# Altium PCB BUCKCONVERTER-V1L1.PcbDoc (part 1 of 3)
Units mm, origin at the board's own origin, x right, y up, seen from the top; angles counter-clockwise.
Board outline 95.98 x 51.66 mm, 2 copper layers (Top Layer, Bottom Layer); 114 components, 64 nets, 347 pads, 125 vias.
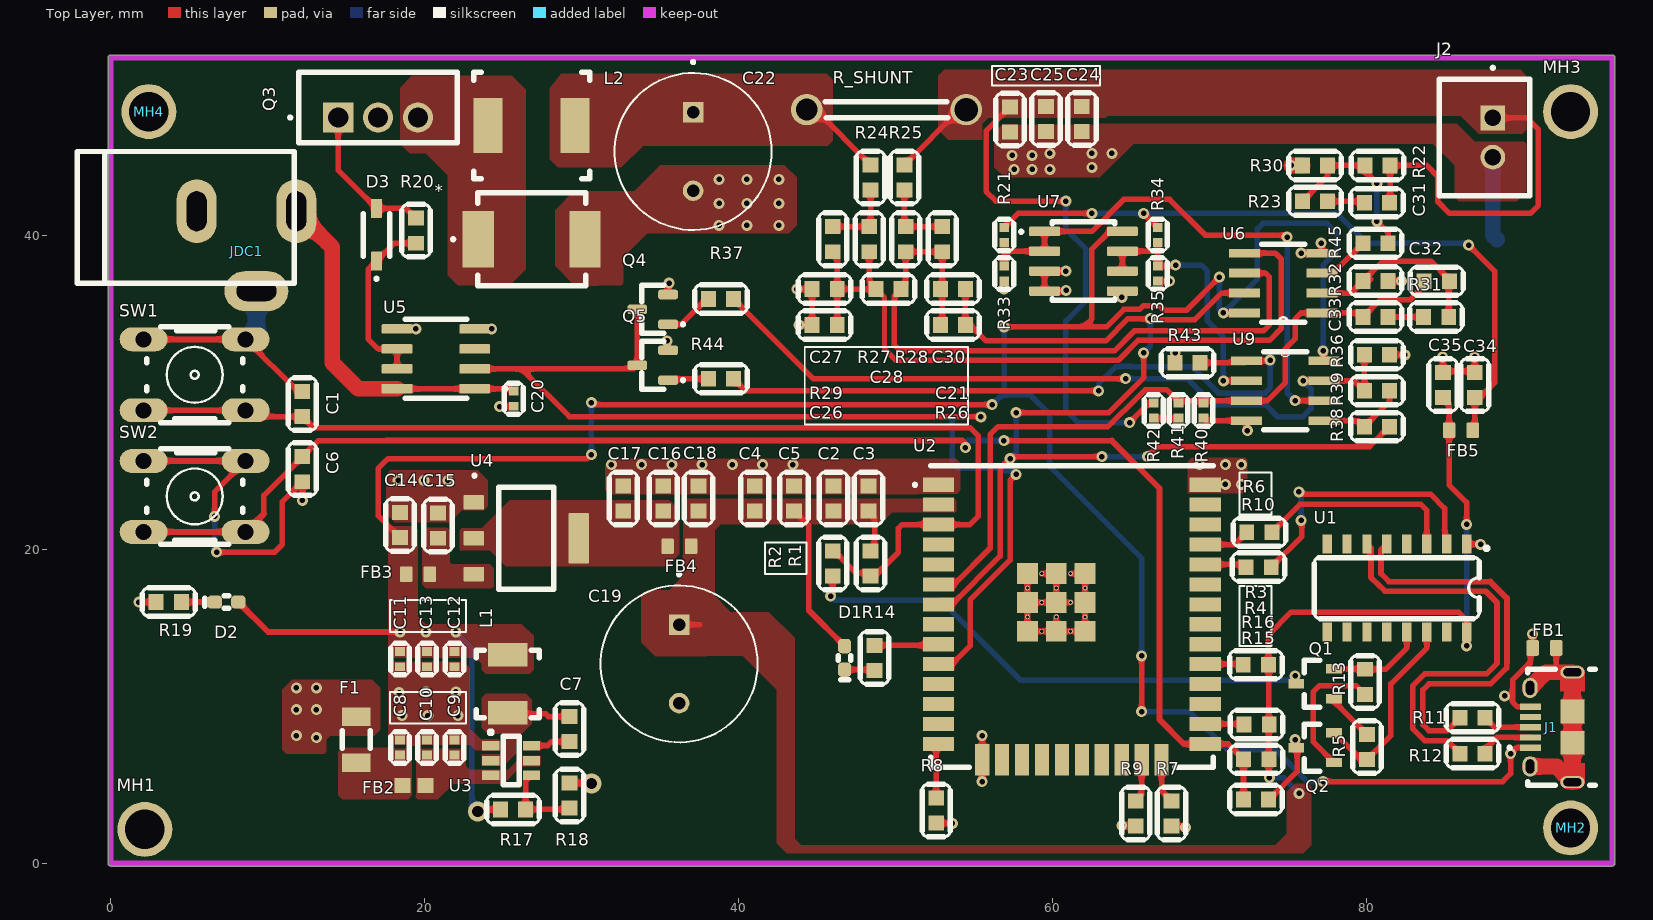
[diagram p0: Top Layer view]
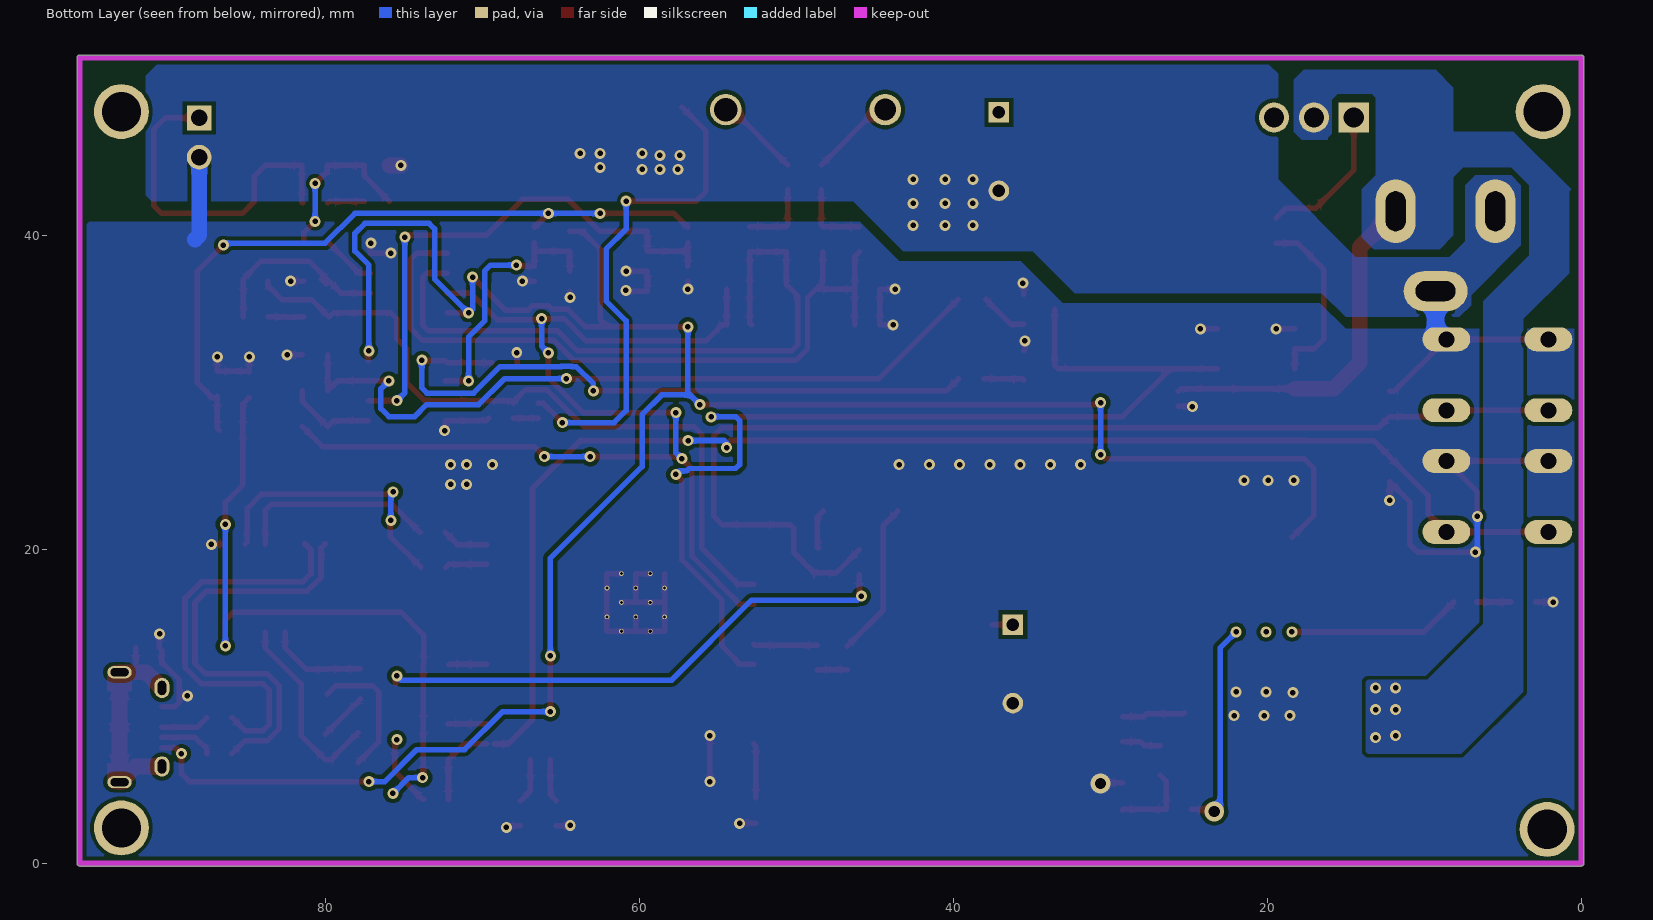
[diagram p1: Bottom Layer view, seen from below]
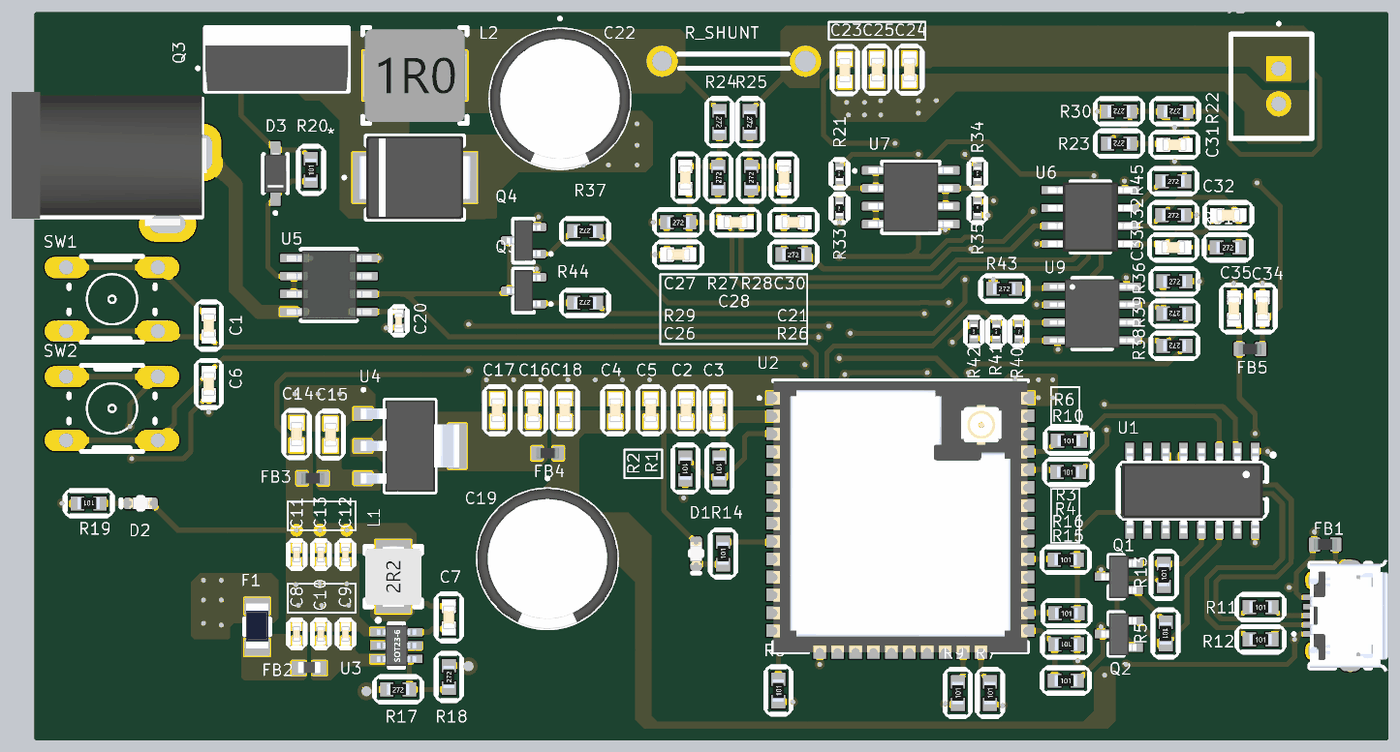
[diagram p3: 3D render of the assembled board from above, using the file's embedded part models]

## Layer stack, top to bottom
Top Solder: solder mask 0.0102, Solder Resist, Dk 3.5
Top Layer: signal copper 0.0356
Dielectric 1: dielectric 0.32, FR-4, Dk 4.8
Bottom Layer: signal copper 0.0356
Bottom Solder: solder mask 0.0102, Solder Resist, Dk 3.5

## Board outline
0,-0.175 cw(c0,0) -0.175,0 -0.175,51.308 cw(c0,51.308) 0,51.483 95.631,51.483 cw(c95.631,51.308) 95.806,51.308 95.806,0 cw(c95.631,0) 95.631,-0.175

## Design rules (kind name [scope] priority, off if disabled: settings)
Clearance [All] p1: gap=0.254 ignorepadtopadclearanceinfootprint=FALSE
DiffPairsRouting [All] p1: maxlimit=0.254 minlimit=0.254 mostfreqgap=0.254 toplayer_minwidth=0.381 toplayer_maxwidth=0.381 toplayer_prefwidth=0.381 bottomlayer_minwidth=0.381 bottomlayer_maxwidth=0.381 bottomlayer_prefwidth=0.381 maxuncoupledlength=12.7
HoleToHoleClearance [All] p1: gap=0 allowstackedmicrovias=TRUE
MinimumSolderMaskSliver [All] p1: minsoldermaskwidth=0
PolygonConnect [All] p1: connectstyle=Direct reliefconductorwidth=0.254 reliefentries=4 polygonreliefangle="90 Angle" airgapwidth=0.254
RoutingVias [All] p1: holewidth=0.35 width=0.7 viastyle="Through Hole" minholewidth=0.35 minwidth=0.7 maxholewidth=0.5 maxwidth=1
SilkToSilkClearance [All] p1: silktosilkclearance=0
SilkToSolderMaskClearance [IsPad] p1: minsilkscreentomaskgap=0 clearancetoexposedcopper=TRUE
SolderMaskExpansion [All] p1: expansion=0.102 istentingtop=FALSE
Width [All] p1: maxlimit=1 minlimit=0.35 preferedwidth=0.35
25 further rules are at their usual default settings.

## Classes and differential pairs
component class "U_BUCKCONVERTER - POWER": * C20 C21 C22 C23 C24 C25 C26 C27 C28 C30 C31 C32 C33 C34 C35 D3 FB5 J2 L2 MH1 MH2 MH3 MH4 Q3 Q4 Q5 R20 R21 R22 R23 R24 R25 R26 R27 R28 R29 R30 R31 R32 R33 R34 R35 R36 R37 R38 R39 R40 R41 R42 R43 R44 R45 R_SHUNT U5 U6 U7 U8 U9
component class U_BUCKCONVERTER-MCU: C1 C2 C3 C4 C5 C7 C8 C9 C10 C11 C12 C13 C14 C15 C16 C17 C18 C19 D1 D2 F1 FB1 FB2 FB3 FB4 J1 JDC1 L1 Q1 Q2 R1 R2 R3 R4 R5 R6 R7 R8 R9 R10 R11 R12 R13 R14 R15 R16 R17 R18 R19 SW1 SW2 U1 U2 U3 U4
differential pair D: +D_P -D_N

## Components (designator, comment, footprint, x,y, rotation, side; value= is the part's Value field where it differs from the comment)
* "SS34-E3/9AT" SS34 26.924,39.624 r0 top
C1 "100nF" "CAP 0603" 12.192,29.337 r270 top
C2 "100nF" "CAP 0603" 46.022,23.329 r270 top
C3 "10 µF" "CAP 0603" 48.26,23.329 r270 top
C4 "10 µF" "CAP 0603" 41.006,23.329 r270 top
C5 "100nF" "CAP 0603" 43.514,23.329 r270 top
C6 "100nF" "CAP 0603" 12.192,25.019 r90 top
C7 "100nF" CAP-CER0603-0.8H 29.21,8.547 r270 top
C8 "10uF" CAP-CER0402-20mil 18.415,7.366 r270 top
C9 "10uF" CAP-CER0402-20mil 21.882,7.366 r270 top
C10 "10uF" CAP-CER0402-20mil 20.13,7.366 r270 top
C11 "10uF" CAP-CER0402-20mil 18.415,12.999 r90 top
C12 "10uF" CAP-CER0402-20mil 21.882,12.999 r90 top
C13 "10uF" CAP-CER0402-20mil 20.13,12.999 r90 top
C14 "10 µF" "CAP 0603" 18.415,21.637 r270 top
C15 "10 µF" "CAP 0603" 20.828,21.59 r270 top
C16 "100nF" "CAP 0603" 35.179,23.329 r270 top
C17 "10 µF" "CAP 0603" 32.639,23.329 r270 top
C18 "10 µF" "CAP 0603" 37.433,23.329 r270 top
C19 "ECA1CHG331" 330UF-5mm 36.195,12.7 r270 top
C20 "100nF" CAP-CER0402-20mil 25.654,29.591 r90 top
C21 "10pF" CAP-CER0603-0.8H 53.632,36.576 r0 top
C22 "22uF" 330UF-5mm 37.084,45.339 r270 top
C23 "10uF" "Cap cer 0603" 57.277,47.371 r90 top
C24 "10uF" "Cap cer 0603" 61.852,47.409 r90 top
C25 "10uF" "Cap cer 0603" 59.566,47.409 r90 top
C26 "10pF" CAP-CER0603-0.8H 45.466,34.29 r0 top
C27 "220pF" CAP-CER0603-0.8H 45.974,39.751 r90 top
C28 "1nF" CAP-CER0603-0.8H 49.53,36.576 r180 top
C30 "220pF" CAP-CER0603-0.8H 52.959,39.751 r90 top
C31 "10nF" "Cap cer 0603" 80.641,42.076 r0 top
C32 "10nF" "Cap cer 0603" 84.455,37.084 r180 top
C33 "10nF" "Cap cer 0603" 80.556,34.801 r180 top
C34 "10 µF" "CAP 0603" 86.882,30.548 r270 top
C35 "10 µF" "CAP 0603" 84.85,30.548 r270 top
D1 "Orange" LED 46.736,13.208 r90 top
D2 "Orange" LED 7.493,16.637 r0 top
D3 "1N4148W" 1N4148 17.043,39.904 r90 top
F1 "C1F5" "FUSE C1F5" 15.621,7.874 r270 top
FB1 "330 Ohms @ 100 MHz" FB_0603 91.313,13.716 r0 top
FB2 "100MHz 2A 50mOhm" "FB 0603" 19.304,4.953 r0 top
FB3 "330 Ohms @ 100 MHz" FB_0603 19.558,18.415 r0 top
FB4 "330 Ohms @ 100 MHz" FB_0603 36.207,20.193 r0 top
FB5 "330 Ohms @ 100 MHz" FB_0603 85.993,27.58 r180 top
J1 "MICRO B" "MICRO USB B" 93.099,8.539 r90 top
J2 "B2B-XH-A" JST_B2B-XH-A 87.503,46.228 r90 top
JDC1 "Jac DC" DC0 8.636,38.989 r0 top
L1 "2.2uH" IND-0420-2R2 25.273,11.43 r90 top
L2 "3uH" IND-06030-1uH 26.797,46.99 r0 top
MH1 "MOUNTING HOLE" M3 23.169,-88.004 r0 top
MH2 "MOUNTING HOLE" M3 113.99,-87.913 r0 top
MH3 "MOUNTING HOLE" M3 113.99,-42.284 r0 top
MH4 "MOUNTING HOLE" M3 23.423,-42.284 r0 top
Q1 "NMOS" SOT23-3 76.708,11.43 r180 top
Q2 "NMOS" SOT23-3 76.708,7.366 r180 top
Q3 "IRF1404PBF" "TO220 AB" 17.145,48.133 r0 top
Q4 "MMBT3904-7-F" MMBT3904 34.544,35.306 r180 top
Q5 "MMBT3904-7-F" MMBT3904 34.544,31.75 r180 top
R1 "10K" "Res 0603" 48.387,19.102 r270 top
R2 "0R" "Res 0603" 45.974,19.102 r270 top
R3 "10K" "Res 0603" 72.931,12.638 r0 top
R4 "10K" "Res 0603" 72.983,8.841 r0 top
R5 "10K" "Res 0603" 80.01,7.404 r270 top
R6 "22R" "Res 0603" 73.152,21.082 r0 top
R7 "10K" "Res 0603" 67.564,3.175 r90 top
R8 "10K" "Res 0603" 52.566,3.357 r90 top
R9 "10K" "Res 0603" 65.278,3.175 r90 top
R10 "22R" "Res 0603" 73.11,18.864 r0 top
R11 "22R" "Res 0603" 86.741,9.271 r0 top
R12 "22R" "Res 0603" 86.741,6.985 r0 top
R13 "10K" "Res 0603" 79.883,11.557 r90 top
R14 "1K" "Res 0603" 48.641,13.081 r90 top
R15 "0R" "Res 0603" 72.936,4.064 r0 top
R16 "10K" "Res 0603" 72.956,6.618 r180 top
R17 "49.9K" RES-CHP0603-0.45H-272 25.616,3.429 r180 top
R18 "10K" RES-CHP0603-0.45H-272 29.21,4.318 r270 top
R19 "1K" "Res 0603" 3.683,16.637 r180 top
R20 "0R" "Res 0603" 19.431,40.297 r90 top
R21 "1k" RES-CHP0402-0.35H 56.896,40.022 r270 top
R22 "30K" RES-CHP0603-0.45H-272 80.683,44.45 r0 top
R23 "1K" RES-CHP0603-0.45H-272 76.708,42.164 r0 top
R24 "0R" RES-CHP0603-0.45H-272 48.387,43.688 r90 top
R25 "0R" RES-CHP0603-0.45H-272 50.546,43.688 r90 top
R26 "1K2" RES-CHP0603-0.45H-272 53.632,34.29 r180 top
R27 "0R" RES-CHP0603-0.45H-272 48.302,39.751 r270 top
R28 "0R" RES-CHP0603-0.45H-272 50.631,39.751 r270 top
R29 "1K2" RES-CHP0603-0.45H-272 45.466,36.576 r180 top
R30 "10K" RES-CHP0603-0.45H-272 76.708,44.45 r0 top
R31 "1k" RES-CHP0603-0.45H-272 84.417,34.798 r180 top
R32 "1k" RES-CHP0603-0.45H-272 80.556,37.084 r180 top
R33 "1k" RES-CHP0402-0.35H 56.896,37.564 r270 top
R34 "1k" RES-CHP0402-0.35H 66.675,40.022 r270 top
R35 "1k" RES-CHP0402-0.35H 66.675,37.564 r270 top
R36 "5K" RES-CHP0603-0.45H-272 80.645,32.385 r180 top
R37 "1K2" RES-CHP0603-0.45H-272 38.862,35.941 r0 top
R38 "10K" RES-CHP0603-0.45H-272 80.645,27.813 r0 top
R39 "10K" RES-CHP0603-0.45H-272 80.645,30.099 r0 top
R40 "30K" RES-CHP0402-0.35H 69.596,28.829 r90 top
R41 "30K" RES-CHP0402-0.35H 68.008,28.829 r270 top
R42 "30K" RES-CHP0402-0.35H 66.421,28.829 r90 top
R43 "5K" RES-CHP0603-0.45H-272 68.58,31.877 r180 top
R44 "1K2" RES-CHP0603-0.45H-272 38.862,30.861 r0 top
R45 "1k" RES-CHP0603-0.45H-272 80.556,39.497 r180 top
R_SHUNT "0.01R" R_SHUNT 49.403,48.006 r0 top
SW1 "SW2" SWITCH 5.334,31.115 r180 top
SW2 "SW2" SWITCH 5.334,23.368 r180 top
U1 "CH340C" CH340C 82.042,17.653 r180 top
U2 "ESP32-WROOM-32UE-N8" ESP32S 60.706,19.108 r0 top
U3 "TPS563201" SOT23-6 25.497,6.543 r0 top
U4 "AMS1117" AMS1117 26.459,20.701 r270 top
U5 "TC4420EOA" SOIC127P600X175-8N 20.701,32.131 r180 top
U6 "AD8629ARZ" AD8629ARZ 74.676,36.83 r180 top
U7 "LM358DT" "SOIC 8" 62.202,38.463 r0 top
U9 "LM393D" LM393 74.803,30.099 r0 top

## Footprints (in the part's own frame and the unit in brackets; to place one, negate y for a bottom-side part, rotate by r counter-clockwise, add the part's x,y. Pads: shape width x height; smd on the part's side, far side on the other; paste and mask are expansions set on the pad)
1N4148 [mm]
  rrect18% 1.21x0.73 smd: A(1.807,0.127) C(-1.553,0.127)
  silkscreen extent -2.77,-0.72 1.48,0.98, body extent -1.7,-0.65 1.95,0.9, height 0.74
330UF-5mm [mm]
  rect 1.308x1.308 / inner round 1.308 / far side rect 1.308x1.308 hole 0.8: 1(-2.5,0)
  round 1.308 hole 0.8: 2(2.5,0)
  silkscreen extent -5.8,-5 5,5, body extent -5,-5 5,5, height 20
AD8629ARZ [mil]
  rect 78x22 smd: 1(-97,70) 2(-97,20) 3(-97,-30) 4(-97,-80) 5(97,-80) 6(97,-30) 7(97,20) 8(97,70)
  silkscreen extent -54,-103 54,93, body extent -118,-101 118,91, height 69
AMS1117 [mm]
  rrect15% 0.93x1.31 smd: 1(-2.29,-3.345) 2(0,-3.345) 3(2.29,-3.345)
  rrect15% 3.24x1.31 smd: 4(0,3.345)
  silkscreen extent -4.09,-3.4 3.25,1.75, body extent -3.25,-3.5 3.25,3.5, height 1.8
"CAP 0603" [mm]
  rect 0.95x1 smd: 1(-0.715,0) 2(0.885,0)
  silkscreen extent -1.59,-0.9 1.76,0.9, body extent -1.19,-0.5 1.36,0.5, height 0.82
"Cap cer 0603" [mm]
  rect 0.95x1 smd: 1(-0.8,0.003) 2(0.8,0.003)
  silkscreen extent -1.68,-0.9 1.68,0.9, body extent -1.28,-0.5 1.28,0.5, height 0.82
CAP-CER0402-20mil [mm]
  rect 0.57x0.62 smd: 1(-0.48,0) 2(0.48,0)
  silkscreen extent -1,-0.6 1,0.6, body extent -0.8,-0.33 0.8,0.32, height 0.53
CAP-CER0603-0.8H [mm]
  rect 0.95x1 smd: 1(-0.8,0) 2(0.8,0)
  silkscreen extent -1.68,-0.9 1.68,0.9, body extent -1.28,-0.5 1.28,0.5, height 0.84
CH340C [mm]
  rect 0.6x1.2 smd: 1(-4.318,-2.673) 2(-3.048,-2.673) 3(-1.778,-2.673) 4(-0.508,-2.673) 5(0.762,-2.673) 6(2.032,-2.673) 7(3.302,-2.673) 8(4.572,-2.673) 9(4.572,2.927) 10(3.302,2.927) 11(2.032,2.927) 12(0.762,2.927) 13(-0.508,2.927) 14(-1.778,2.927) 15(-3.048,2.927) 16(-4.318,2.927)
  silkscreen extent -5.71,-2.54 5.39,2.07, body extent -4.87,-2.87 5.13,3.13, height 1.8
DC0 [mil]
  oval 100x160 hole 50 slot 100 at 90 deg: 1(125,100) 2(-125,100)
  oval 160x100 hole 50 slot 100 at 0 deg: 3(25,-100)
  silkscreen extent -425,-80 120,250, body extent -410,-105 134,269, height 434
ESP32S [mm]
  rect 2x0.9 smd: 1(-7.992,5.006) 2(-7.992,3.736) 3(-7.992,2.466) 4(-7.992,1.196) 5(-7.992,-0.074) 6(-7.992,-1.344) 7(-7.992,-2.614) 8(-7.992,-3.884) 9(-7.992,-5.154) 10(-7.992,-6.424) 11(-7.992,-7.694) 12(-7.992,-8.964) 13(-7.992,-10.234) 14(-7.992,-11.504) 25(9.008,-11.504) 26(9.008,-10.234) 27(9.008,-8.964) 28(9.008,-7.694) 29(9.008,-6.424) 30(9.008,-5.154) 31(9.008,-3.884) 32(9.008,-2.614) 33(9.008,-1.344) 34(9.008,-0.074) 35(9.008,1.196) 36(9.008,2.466) 37(9.008,3.736) 38(9.008,5.006)
  rect 0.9x2 smd: 15(-5.207,-12.504) 16(-3.937,-12.504) 17(-2.667,-12.504) 18(-1.397,-12.504) 19(-0.127,-12.504) 20(1.143,-12.504) 21(2.413,-12.504) 22(3.683,-12.504) 23(4.953,-12.504) 24(6.223,-12.504)
  rect 1.33x1.33 smd: 39_1(-2.327,-0.659) 39_2(-0.492,-0.659) 39_3(1.343,-0.659) 39_4(-2.327,-2.494) 39_5(-0.492,-2.494) 39_6(1.343,-2.494) 39_7(-2.327,-4.329) 39_8(-0.492,-4.329) 39_9(1.343,-4.329)
  round 0.3 hole 0.2: 39_10(-1.409,-0.659) 39_11(0.426,-0.659) 39_12(-2.327,-1.576) 39_13(-0.492,-1.576) 39_14(1.343,-1.576) 39_15(-1.409,-2.494) 39_16(0.426,-2.494) 39_17(-2.327,-3.411) 39_18(-0.492,-3.411) 39_19(1.343,-3.411) 39_20(-1.409,-4.329) 39_21(0.426,-4.329)
  silkscreen extent -9.59,-13 9.53,6.22, body extent -8.49,-13.03 9.51,6.17, height 3.35
"FB 0603" [mm]
  rect 1x0.97 smd: 1(-0.733,-0.006) 2(0.737,-0.006)
  body extent -0.79,-0.36 0.81,0.44, height 0.75
FB_0603 [mm]
  rrect25% 0.8x1 smd: 1(-0.75,0) 2(0.75,0)
  body extent -0.8,-0.4 0.8,0.4, height 0.81
"FUSE C1F5" [mm]
  rect 1.17x1.8 smd: 1(-1.47,0) 2(1.47,0)
  silkscreen extent -0.56,-0.89 0.56,0.89, body extent -1.65,-0.8 1.55,0.78, height 0.8
IND-0420-2R2 [mm]
  rect 1.5x2.5 smd: 1(-1.85,0) 2(1.85,0)
  silkscreen extent -2.15,-2 2.15,2, body extent -2.15,-2 2.15,2, height 2.2
IND-06030-1uH [mm]
  rect 1.85x3.5 smd: 1(-2.775,0) 2(2.775,0)
  silkscreen extent -3.7,-3.4 3.7,3.4, body extent -3.65,-3.3 3.65,3.3, height 3.01
JST_B2B-XH-A [mm]
  rect 1.575x1.575 / inner round 1.575 / far side rect 1.575x1.575 hole 1.05: 1(1.25,-0.525)
  round 1.575 hole 1.05: 2(-1.25,-0.525)
  silkscreen extent -3.7,-2.88 4.54,2.88
LED [mm]
  rrect53% 0.91x0.83 smd: 1(0.623,0) 2(-0.877,0)
  silkscreen extent -1.52,-0.4 0.01,0.4, body extent -0.93,-0.4 0.67,0.4, height 0.7
LM393 [mil]
  rect 78x22 smd: 1(-97,75) 2(-97,25) 3(-97,-25) 4(-97,-75) 5(97,-75) 6(97,-25) 7(97,25) 8(97,75)
  silkscreen extent -54,-98 54,98, body extent -118,-96 118,96, height 69
M3 [mm]
  round 3.5 hole 2.5: 1(-21.01,90.163)
"MICRO USB B" [mm]
  rect 0.4x1.35 smd: 1(-1.173,2.675) 2(-0.523,2.675) 3(0.127,2.675) 4(0.777,2.675) 5(1.427,2.675)
  oval 0.775x1.55 hole 0.5 slot 1.15 at 90 deg mask+0: SH1(-3.373,0) SH4(3.627,0)
  rect 1.5x1.55 smd: SH2(1.127,0) SH3(-0.873,0)
  oval 1.3x0.95 hole 0.55 slot 0.9 at 0 deg: SH5(-2.373,2.7) SH6(2.627,2.7)
  Top Layer region: 3.598,0.774 3.624,0.772 3.65,0.769 3.676,0.764 3.701,0.758 3.727,0.751 3.751,0.742 3.775,0.732 3.799,0.721 3.822,0.708 3.844,0.694 3.866,0.68 3.887,0.664 3.907,0.647 3.926,0.629 3.944,0.61 3.961,0.59 3.977,0.569 3.991,0.547 4.005,0.525 4.018,0.502 4.029,0.478 4.039,0.454 4.048,0.43 4.055,0.404 4.061,0.379 4.066,0.353 4.069,0.327 4.071,0.301 4.072,0.275 4.072,-0.275 4.071,-0.301 4.069,-0.327 4.066,-0.353 4.061,-0.379 4.055,-0.404 4.048,-0.43 4.039,-0.454 4.029,-0.478 4.018,-0.502 4.005,-0.525 3.991,-0.547 3.977,-0.569 3.961,-0.59 3.944,-0.61 3.926,-0.629 3.907,-0.647 3.887,-0.664 3.866,-0.68 3.844,-0.694 3.822,-0.708 3.799,-0.721 3.775,-0.732 3.751,-0.742 3.727,-0.751 3.701,-0.758 3.676,-0.764 3.65,-0.769 3.624,-0.772 3.598,-0.774 3.572,-0.775 2.427,-0.775 2.427,0.775 3.572,0.775
  Top Layer region: -2.173,-0.775 -3.318,-0.775 -3.344,-0.774 -3.37,-0.772 -3.396,-0.769 -3.422,-0.764 -3.447,-0.758 -3.473,-0.751 -3.497,-0.742 -3.521,-0.732 -3.545,-0.721 -3.568,-0.708 -3.59,-0.694 -3.612,-0.68 -3.633,-0.664 -3.653,-0.647 -3.672,-0.629 -3.69,-0.61 -3.707,-0.59 -3.723,-0.569 -3.737,-0.547 -3.751,-0.525 -3.764,-0.502 -3.775,-0.478 -3.785,-0.454 -3.794,-0.43 -3.801,-0.404 -3.807,-0.379 -3.812,-0.353 -3.815,-0.327 -3.817,-0.301 -3.818,-0.275 -3.818,0.275 -3.817,0.301 -3.815,0.327 -3.812,0.353 -3.807,0.379 -3.801,0.404 -3.794,0.43 -3.785,0.454 -3.775,0.478 -3.764,0.502 -3.751,0.525 -3.737,0.547 -3.723,0.569 -3.707,0.59 -3.69,0.61 -3.672,0.629 -3.653,0.647 -3.633,0.664 -3.612,0.68 -3.59,0.694 -3.568,0.708 -3.545,0.721 -3.521,0.732 -3.497,0.742 -3.473,0.751 -3.447,0.758 -3.422,0.764 -3.396,0.769 -3.37,0.772 -3.344,0.774 -3.318,0.775 -2.173,0.775
  silkscreen extent -3.57,-1.45 3.83,4.1, body extent -3.9,-2.68 4.15,2.85, height 2.67
MMBT3904 [mm]
  rrect50% 1.26x0.61 smd: B(-0.944,0.976) C(1.016,0.026) E(-0.944,-0.924)
  silkscreen extent -1.99,-1.5 0.74,1.55, body extent -1.16,-1.42 1.24,1.48, height 1.15
R_SHUNT [mm]
  round 2 hole 1.4: 1(-5.08,0)
  round 2 hole 1.5: 2(5.08,0)
  silkscreen extent -3.9,-0.51 3.9,0.51, body extent -5.46,-0.51 5.71,0.51, height 7
"Res 0603" [mm]
  rect 0.95x1 smd: 1(-0.8,0) 2(0.8,0)
  silkscreen extent -1.68,-0.9 1.68,0.9, body extent -0.8,-0.4 0.8,0.4, height 0.48
RES-CHP0402-0.35H [mm]
  rect 0.57x0.62 smd: 1(-0.48,0) 2(0.48,0)
  silkscreen extent -1,-0.6 1,0.6, body extent -0.48,-0.25 0.52,0.25, height 0.35
RES-CHP0603-0.45H-272 [mm]
  rect 0.95x1 smd: 1(-0.8,0) 2(0.8,0)
  silkscreen extent -1.68,-0.9 1.68,0.9, body extent -0.8,-0.4 0.8,0.4, height 0.48
SOIC127P600X175-8N [mm]
  rrect25% 1.97x0.6 smd: 1(-2.475,1.905) 2(-2.475,0.635) 3(-2.475,-0.635) 4(-2.475,-1.905) 5(2.475,-1.905) 6(2.475,-0.635) 7(2.475,0.635) 8(2.475,1.905)
  silkscreen extent -4.54,-2.52 1.95,2.52, body extent -3.04,-2.44 2.96,2.46, height 1.75
"SOIC 8" [mm]
  rrect25% 1.97x0.6 smd: 1(-2.728,1.794) 2(-2.728,0.524) 3(-2.728,-0.746) 4(-2.728,-2.016) 5(2.222,-2.016) 6(2.222,-0.746) 7(2.222,0.524) 8(2.222,1.794)
  silkscreen extent -4.32,-2.61 1.75,2.39, body extent -3.25,-2.56 2.75,2.34, height 1.75
SOT23-3 [mm]
  rect 1x0.6 smd: 1(-1.2,0.95) 2(-1.2,-0.95) 3(1.2,0)
  silkscreen extent -0.3,-1.5 0.7,1.5, body extent -1.24,-1.49 1.26,1.51, height 1.1
SOT23-6 [mm]
  rect 1.1x0.6 smd: 1(-1.3,0.95) 2(-1.3,0) 3(-1.3,-0.95) 4(1.3,-0.95) 5(1.3,0) 6(1.3,0.95)
  silkscreen extent -1.42,-1.55 0.5,1.92, body extent -1.4,-1.45 1.4,1.45, height 1.27
SS34 [mm]
  rect 2x3.6 smd: A(3.273,0.127) C(-3.527,0.127)
  silkscreen extent -5.23,-2.82 3.31,3.08, body extent -4.1,-2.82 3.85,3.08, height 2.65
SWITCH [mil]
  oval 120x60 hole 40: 1(-128,89) 2(128,89) 3(-128,-89) 4(128,-89)
  silkscreen extent -120,-120 120,120, body extent -161,-122 151,122, height 374
"TO220 AB" [mm]
  rect 1.92x1.92 / inner round 1.92 / far side rect 1.92x1.92 hole 1.28: 1(-2.667,-0.63)
  round 1.92 hole 1.28: 2(-0.127,-0.63) 3(2.413,-0.63)
  silkscreen extent -5.83,-2.25 4.92,2.25, body extent -5.28,-2.25 5.03,2.25, height 18.9

## Part data
*: "Rectifier Diode, Schottky, 1 Phase, 1 Element, 3A, 40V V(RRM), Silicon, DO-214AB", Average Rectified Current=3A, Case/Package=SMC, Forward Voltage=500mV, Manufacturer=Vishay, Max Forward Surge Current (Ifsm)=100A, Max Junction Temperature (Tj)=150°C, Max Repetitive Reverse Voltage (Vrrm)=40V, Max Reverse Leakage Current=500µA, Min Operating Temperature=-55°C, Category="Rectifier Diodes", China RoHS=Non-Compliant, ComponentLink1Description=https://datasheet.octopart.com:443/SS34-E3-9AT-Vishay-datasheet-181475108.pdf?src-supplier=IHS, ComponentLink1URL=https://datasheet.octopart.com:443/SS34-E3-9AT-Vishay-datasheet-181475108.pdf?src-supplier=IHS, ComponentLink2Description=https://datasheet.octopart.com:443/SS34-E3-9AT-Vishay-datasheet-138899081.pdf?src-supplier=Upverter, ComponentLink2URL=https://datasheet.octopart.com:443/SS34-E3-9AT-Vishay-datasheet-138899081.pdf?src-supplier=Upverter, ComponentLink3Description=https://datasheet.octopart.com:443/SS34-E3-9AT-Vishay-datasheet-188933186.pdf?src-supplier=TME, ComponentLink3URL=https://datasheet.octopart.com:443/SS34-E3-9AT-Vishay-datasheet-188933186.pdf?src-supplier=TME, ComponentLink4Description=https://datasheet.octopart.com:443/SS34-E3-9AT-Vishay-datasheet-15599040.pdf?src-supplier=Future+Electronics, ComponentLink4URL=https://datasheet.octopart.com:443/SS34-E3-9AT-Vishay-datasheet-15599040.pdf?src-supplier=Future+Electronics, ComponentLink5Description=https://datasheet.octopart.com:443/SS34-E3/9AT-Vishay-datasheet-11610764.pdf?src-supplier=Arrow+Electronics, ComponentLink5URL=https://datasheet.octopart.com:443/SS34-E3/9AT-Vishay-datasheet-11610764.pdf?src-supplier=Arrow+Electronics, ComponentLink6Description=http://sigma.octopart.com:80/rohs_statement/Vishay-company-15.pdf?src-supplier=Compliance+Statements, ComponentLink6URL=http://sigma.octopart.com:80/rohs_statement/Vishay-company-15.pdf?src-supplier=Compliance+Statements, Element Configuration=Single, Forward Current=3A, Height=2.62mm, Lifecycle Status=Production, Manufacturer Part Number=SS34-E3/9AT, Max Operating Temperature=150°C, Max Output Current=3A, Max Reverse Voltage (DC)=40V, Max Surge Current=100A, MOUNT="Surface Mount", Number of Elements=1, Number of Pins=2, Number of Terminals=2, Peak Non-Repetitive Surge Current=100A, Peak Reverse Current=500µA, Pricing 1="3500=0,08437 (USD)", Radiation Hardening=No, REACH SVHC=No, Reverse Standoff Voltage=40V, Reverse Voltage=40V, RoHS=Compliant, Schedule B="8541100080, 8541100080|8541100080|8541100080|8541100080|8541100080", Stock 1=31500, Supplier 1=Avnet, Supplier Part Number 1=SS34-E3/9AT
C1 C2 C5 C6 C16: library part GMC10X7R106K10NT, "CAP0603 X7R 10UF 10% 10V", Capacitance="10 µF", Device Package="0603 (1608 Metric)", Manufacturer="Cal-Chip Electronics, Inc.", Operating Temperature="-55°C ~ 125°C", Supplier Part Number 1=4713-GMC10X7R106K10NTCT-ND, Temperature Coefficient=X7R, Tolerance=±10%, Voltage - Rated=10V, Applications="General Purpose", ComponentLink1Description=Datasheet, ComponentLink1URL=https://88ce57.p3cdn1.secureserver.net/wp-content/uploads/2023/01/gmc_series-2.pdf, ComponentLink2Description="DigiKey Link", ComponentLink2URL=https://www.digikey.com/en/products/detail/cal-chip-electronics-inc/GMC10X7R106K10NT/18151126, LastUpdated="2/9/2024 8:09:39 PM", Lifecycle Status=Active, Minimum Order=1, Mounting Type="Surface Mount, MLCC", Package / Case="0603 (1608 Metric)", Packaging=TapeAndReel, Part Number=GMC10X7R106K10NT, Part Status=Active, partid=49835, Price=0.26, Series=GMC, Size / Dimension="0.063\" L x 0.031\" W (1.60mm x 0.80mm)", Supplier 1=DigiKey, Thickness (Max)="0.039\" (1.00mm)"
C3 C4 C14 C15 C17 C18 C34 C35: library part GMC10X7R106K10NT, "CAP0603 X7R 10UF 10% 10V", Device Package="0603 (1608 Metric)", Manufacturer="Cal-Chip Electronics, Inc.", Operating Temperature="-55°C ~ 125°C", Supplier Part Number 1=4713-GMC10X7R106K10NTCT-ND, Temperature Coefficient=X7R, Tolerance=±10%, Voltage - Rated=10V, Applications="General Purpose", Capacitance="10 µF", ComponentLink1Description=Datasheet, ComponentLink1URL=https://88ce57.p3cdn1.secureserver.net/wp-content/uploads/2023/01/gmc_series-2.pdf, ComponentLink2Description="DigiKey Link", ComponentLink2URL=https://www.digikey.com/en/products/detail/cal-chip-electronics-inc/GMC10X7R106K10NT/18151126, LastUpdated="2/9/2024 8:09:39 PM", Lifecycle Status=Active, Minimum Order=1, Mounting Type="Surface Mount, MLCC", Package / Case="0603 (1608 Metric)", Packaging=TapeAndReel, Part Number=GMC10X7R106K10NT, Part Status=Active, partid=49835, Price=0.26, Series=GMC, Size / Dimension="0.063\" L x 0.031\" W (1.60mm x 0.80mm)", Supplier 1=DigiKey, Thickness (Max)="0.039\" (1.00mm)"
C7: library part "CAPCER0001 100nF 10% 50V X7R 0603 SMD_1", "CAP CER 100nF 10% 50V X7R 0603 SMD", CERTIFICATION=NA, CLASS=B, ComponentLink1Description=Datasheet, ComponentLink1URL=https://datasheet.lcsc.com/lcsc/1811021431_Samsung-Electro-Mechanics-CL10B104KB8NNNC_C1591.pdf, LINE=SMT, MOUNT=SMD, TMG CODE=None, TMG PN=CAPCER0001, TYPE=EP, UNIT=PCS
C8 C9 C10 C11 C12 C13 C20: library part "CAPCER0040 10uF 20% 6.3V X5R 0402 SMD", "CAP CER 10uF 20% 6.3V X5R 0402 SMD", CERTIFICATION=NA, CLASS=B, ComponentLink1Description=Datasheet, ComponentLink1URL=https://datasheet.lcsc.com/lcsc/2304140030_YAGEO-CC0402MRX5R5BB106_C105884.pdf, LINE=SMT, MOUNT=SMD, TMG CODE=None, TMG PN=CAPCER0013, TYPE=EP, UNIT=PCS
C19: "Cap Aluminum 330uF 16V 20% (8 X 11.5mm) Radial Aluminum Cylindrical Can 3.5mm 260mA 1000 hr 105C Bulk", Package="RADIAL-2 Panasonic", Availability="In Stock", Check_prices=https://www.snapeda.com/parts/ECA-1CHG331/Panasonic/view-part/?ref=eda, MF=Panasonic, MP=ECA-1CHG331, Price=None, Purchase-URL=https://pricing.snapeda.com/search/part/ECA-1CHG331/?ref=eda, SnapEDA_Link=https://www.snapeda.com/parts/ECA-1CHG331/Panasonic/view-part/?ref=snap
C21 C26 C27 C28 C30: library part "CAPCER0003 220pF 10% 50V X7R 0603 SMD", "CAP CER 220pF 10% 50V X7R 0603 SMD", CERTIFICATION=NA, CLASS=B, ComponentLink1Description=Datasheet, ComponentLink1URL=https://datasheet.lcsc.com/lcsc/1810261515_Samsung-Electro-Mechanics-CL10B221KB8NNNC_C1603.pdf, LINE=SMT, MOUNT=SMD, TMG CODE=None, TMG PN=CAPCER0003, TYPE=EP, UNIT=PCS
C22: library part "CAP 47uF 63V_1"
C23 C24 C25: library part GRT188R61E106ME13D, "SMD Multilayer Ceramic Capacitor, 10 ï¿½F, 25 V, 0603 [1608 Metric], ï¿½ 20%, X5R", Case Code (Imperial)=0603, Case Code (Metric)=1608, Dielectric=X5R, Manufacturer=Murata, Max Operating Temperature=85°C, Min Operating Temperature=-55°C, Package Quantity=4000, Ratings=AEC-Q200, Supplier Part Number 1=490-12323-1-ND, Tolerance=20%, Voltage Rating=25V, Capacitance=10uF, Case/Package=0603, Category="Ceramic Capacitors", ComponentLink1Description=https://datasheet.octopart.com/GRT188R61E106ME13D-Murata-datasheet-149523595.pdf?src-supplier=Newark, ComponentLink1URL=https://datasheet.octopart.com/GRT188R61E106ME13D-Murata-datasheet-149523595.pdf?src-supplier=Newark, ComponentLink2Description=https://datasheet.octopart.com/GRT188R61E106ME13D-Murata-datasheet-82944876.pdf?src-supplier=Future+Electronics, ComponentLink2URL=https://datasheet.octopart.com/GRT188R61E106ME13D-Murata-datasheet-82944876.pdf?src-supplier=Future+Electronics, ComponentLink3Description=http://search.murata.co.jp/Ceramy/image/img/A01X/G101/ENG/GRT188R61E106ME13-01.pdf?src-supplier=Digikey, ComponentLink3URL=http://search.murata.co.jp/Ceramy/image/img/A01X/G101/ENG/GRT188R61E106ME13-01.pdf?src-supplier=Digikey, ComponentLink4Description=https://search.murata.co.jp/Ceramy/image/img/A01X/G101/ENG/GRT188R61E106ME13-01.pdf?src-supplier=Digikey, ComponentLink4URL=https://search.murata.co.jp/Ceramy/image/img/A01X/G101/ENG/GRT188R61E106ME13-01.pdf?src-supplier=Digikey, ComponentLink5Description=https://datasheet.octopart.com/GRT188R61E106ME13D-Murata-datasheet-165579666.pdf?src-supplier=TME, ComponentLink5URL=https://datasheet.octopart.com/GRT188R61E106ME13D-Murata-datasheet-165579666.pdf?src-supplier=TME, Height=0.8mm, Length=1.6mm, Manufacturer Part Number=GRT188R61E106ME13D, Material=4241ConductorMaterial, MOUNT="Surface Mount", Packaging="Cut Tape", Pricing 1="1=0.25, 10=0.151, 100=0.0931, 4000=0.06965, 8000=0.0635, 12000=0.05993, 20000=0.05654, 28000=0.04257 (USD)", RoHS=No, RoHS Compliant=No, Series=GRT, Stock 1=354696, Supplier 1=Digikey, Termination=Standard, Voltage Rating (DC)=25V, Weight=0.000917oz, Width=0.8mm
C31 C32 C33: library part GRT188R61E106ME13D, "SMD Multilayer Ceramic Capacitor, 10 ï¿½F, 25 V, 0603 [1608 Metric], ï¿½ 20%, X5R", Capacitance=10uF, Case Code (Imperial)=0603, Case Code (Metric)=1608, Dielectric=X5R, Manufacturer=Murata, Max Operating Temperature=85°C, Min Operating Temperature=-55°C, Package Quantity=4000, Ratings=AEC-Q200, Supplier Part Number 1=490-12323-1-ND, Tolerance=20%, Voltage Rating=25V, Case/Package=0603, Category="Ceramic Capacitors", ComponentLink1Description=https://datasheet.octopart.com/GRT188R61E106ME13D-Murata-datasheet-149523595.pdf?src-supplier=Newark, ComponentLink1URL=https://datasheet.octopart.com/GRT188R61E106ME13D-Murata-datasheet-149523595.pdf?src-supplier=Newark, ComponentLink2Description=https://datasheet.octopart.com/GRT188R61E106ME13D-Murata-datasheet-82944876.pdf?src-supplier=Future+Electronics, ComponentLink2URL=https://datasheet.octopart.com/GRT188R61E106ME13D-Murata-datasheet-82944876.pdf?src-supplier=Future+Electronics, ComponentLink3Description=http://search.murata.co.jp/Ceramy/image/img/A01X/G101/ENG/GRT188R61E106ME13-01.pdf?src-supplier=Digikey, ComponentLink3URL=http://search.murata.co.jp/Ceramy/image/img/A01X/G101/ENG/GRT188R61E106ME13-01.pdf?src-supplier=Digikey, ComponentLink4Description=https://search.murata.co.jp/Ceramy/image/img/A01X/G101/ENG/GRT188R61E106ME13-01.pdf?src-supplier=Digikey, ComponentLink4URL=https://search.murata.co.jp/Ceramy/image/img/A01X/G101/ENG/GRT188R61E106ME13-01.pdf?src-supplier=Digikey, ComponentLink5Description=https://datasheet.octopart.com/GRT188R61E106ME13D-Murata-datasheet-165579666.pdf?src-supplier=TME, ComponentLink5URL=https://datasheet.octopart.com/GRT188R61E106ME13D-Murata-datasheet-165579666.pdf?src-supplier=TME, Height=0.8mm, Length=1.6mm, Manufacturer Part Number=GRT188R61E106ME13D, Material=4241ConductorMaterial, MOUNT="Surface Mount", Packaging="Cut Tape", Pricing 1="1=0.25, 10=0.151, 100=0.0931, 4000=0.06965, 8000=0.0635, 12000=0.05993, 20000=0.05654, 28000=0.04257 (USD)", RoHS=No, RoHS Compliant=No, Series=GRT, Stock 1=354696, Supplier 1=Digikey, Termination=Standard, Voltage Rating (DC)=25V, Weight=0.000917oz, Width=0.8mm
D1 D2: library part "LED ORANGE 606NM 0603", "LED SMARTLED ORANGE 606NM 0603", Current - Test=2mA, Luminous Flux @ Current - Test="25 mlm", Manufacturer="OSRAM Opto Semiconductors Inc", Manufacturer Part Number="LO L29K-H2K1-24-Z", Millicandela Rating=6.3mcd, Package / Case=LED_0603, Supplier Part Number 1=475-2740-1-ND, Voltage - Forward (Vf) Typ=1.8V, By=Hieu.Nguyen_20191030, Category=Optoelectronics, Color=Orange, ComponentLink1Description=http://catalog.osram-os.com/catalogue/catalogue.do;jsessionid=302CF83AF637AE24E40AEB0ADA267EDD?act=downloadFile&favOid=020000010003f9de000100b6, ComponentLink1URL=http://catalog.osram-os.com/catalogue/catalogue.do;jsessionid=302CF83AF637AE24E40AEB0ADA267EDD?act=downloadFile&favOid=020000010003f9de000100b6, Height=0.65mm, Lens Style/Size="Rectangle with Flat Top, 1.3mm x 0.8mm", Lens Type=Diffused, Mounting Type="Surface Mount", Packaging="Cut Tape (CT)", Pricing 1="1=0.17, 10=0.141, 100=0.1127, 250=0.0986, 500=0.09016 (USD)", RoHS="RoHS Compliant", Size / Dimension="1.70mm L x 0.80mm W", Stock 1=15900, Supplier 1=Digi-Key, Viewing Angle=160°, Wavelength - Dominant=606nm, Wavelength - Peak=610nm
D3: library part 1N4148W-7-F, "Small Signal Diode, Single, 100 V, 300 Ma, 1.25 V, 4 Ns, 2 A Rohs Compliant: Yes", Average Rectified Current=300mA, Capacitance=2pF, Current Rating=150mA, Forward Voltage=1.25V, Manufacturer=Diodes, Max Forward Surge Current (Ifsm)=2A, Max Operating Temperature=150°C, Max Repetitive Reverse Voltage (Vrrm)=100V, Max Reverse Current=1uA, Min Operating Temperature=-65°C, Package Quantity=3000, Power Dissipation=400mW, Voltage Rating (DC)=75V, Category="Rectifier Diodes", ComponentLink1Description=https://datasheet.ciiva.com/8303/ds30086-8303197.pdf?src-supplier=Avnet, ComponentLink1URL=https://datasheet.ciiva.com/8303/ds30086-8303197.pdf?src-supplier=Avnet, ComponentLink2Description=https://datasheet.ciiva.com/911/ds30086-911735.pdf?src-supplier=Digikey, ComponentLink2URL=https://datasheet.ciiva.com/911/ds30086-911735.pdf?src-supplier=Digikey, ComponentLink3Description=https://datasheet.ciiva.com/911/ds30086-911736.pdf?src-supplier=Digikey, ComponentLink3URL=https://datasheet.ciiva.com/911/ds30086-911736.pdf?src-supplier=Digikey, ComponentLink4Description=https://datasheet.ciiva.com/911/ds30086-911734.pdf?src-supplier=Digikey, ComponentLink4URL=https://datasheet.ciiva.com/911/ds30086-911734.pdf?src-supplier=Digikey, ComponentLink5Description=https://datasheet.ciiva.com/1179/1915529-1179304.pdf?src-supplier=Element14, ComponentLink5URL=https://datasheet.ciiva.com/1179/1915529-1179304.pdf?src-supplier=Element14, ComponentLink6Description=https://datasheet.ciiva.com/22695/1915529-22695239.pdf?src-supplier=Element14, ComponentLink6URL=https://datasheet.ciiva.com/22695/1915529-22695239.pdf?src-supplier=Element14, ComponentLink7Description=https://datasheet.ciiva.com/8300/ds30086-8300392.pdf?src-supplier=Avnet, ComponentLink7URL=https://datasheet.ciiva.com/8300/ds30086-8300392.pdf?src-supplier=Avnet, ComponentLink8Description=https://datasheet.ciiva.com/15219/getdatasheetpartid-110030-15219548.pdf?src-supplier=Verical, ComponentLink8URL=https://datasheet.ciiva.com/15219/getdatasheetpartid-110030-15219548.pdf?src-supplier=Verical, ComponentLink9Description=https://datasheet.ciiva.com/4435/ds30086-4435128.pdf?src-supplier=Mouser, ComponentLink9URL=https://datasheet.ciiva.com/4435/ds30086-4435128.pdf?src-supplier=Mouser, Forward Current=150mA, Height=1.25mm, Lead Free="Lead Free", Length=2.85mm, Manufacturer Part Number=1N4148W-7-F, Max Reverse Voltage (DC)=100V, Max Surge Current=2A, MOUNT="Surface Mount", Number of Pins=2, Output Current=150mA, Packaging="Tape and Reel", Peak Non-Repetitive Surge Current=2A, Polarity=Standard, Power Rating=400mW, Pricing 1="9000=0.0099, 15000=0.0099, 21000=0.0099, 30000=0.0099, 75000=0.0099 (USD)", Radiation Hardening=No, Reach SVHC Compliant=No, Recovery Time=4ns, Reverse Recovery Time=4ns, Reverse Recovery Time-Max=4ns, Reverse Voltage=100V, RoHS=Yes, RoHS Compliant=Yes, Series=-, Stock 1=4485000, Supplier 1="Arrow Electronics", Supplier Part Number 1=1N4148W-7-F, Voltage=100V, Weight=0.000353oz, Width=1.7mm
F1: "Fuse Chip Fast Acting 5A 125V SMD Solder Pad 1206 3.2 X 1.58 X 0.63mm", Case Code (Imperial)=1206, Case Code (Metric)=3216, DC Cold Resistance=20mR, Manufacturer="Bel TRP", Max Operating Temperature=125°C, Min Operating Temperature=-55°C, Supplier Part Number 1=48AC8480, Voltage Rating=125V, Voltage Rating (DC)=63V, Case/Package=1206, Category=Uncategorized, ComponentLink1Description=http://www.mouser.com/ds/2/643/C1F-594910.pdf?src-supplier=Mouser, ComponentLink1URL=http://www.mouser.com/ds/2/643/C1F-594910.pdf?src-supplier=Mouser, ComponentLink2Description=http://belfuse.com/pdfs/C1F.pdf?src-supplier=Avnet, ComponentLink2URL=http://belfuse.com/pdfs/C1F.pdf?src-supplier=Avnet, ComponentLink3Description=https://belfuse.com/resources/datasheets/circuitprotection/ds-cp-c1f-series.pdf?src-supplier=Digikey, ComponentLink3URL=https://belfuse.com/resources/datasheets/circuitprotection/ds-cp-c1f-series.pdf?src-supplier=Digikey, Contact Plating=Tin, Fuse Type="Board Mount (Cartridge Style Excluded)", Manufacturer Part Number=C1F5, MOUNT="Surface Mount", Number of Pins=2, Packaging="Cut Tape", RoHS=Yes, Series=C1F, Supplier 1=Newark, Voltage Rating (AC)=125V
FB1 FB3 FB4 FB5: library part BLM18KG331SH1D, "FERRITE BEAD 330 OHM 0603 1LN", Current Rating (Max)=1.7A, DC Resistance (DCR) (Max)=80mOhm, Device Package="0603 (1608 Metric)", Manufacturer="Murata Electronics", Operating Temperature="-55°C ~ 125°C", Ratings=AEC-Q200, Supplier Part Number 1=490-13257-1-ND, ComponentLink1Description=Datasheet, ComponentLink1URL=https://www.murata.com/en-global/products/productdata/8796737273886/QNFA9101.pdf, ComponentLink2Description="DigiKey Link", ComponentLink2URL=https://www.digikey.com/en/products/detail/murata-electronics/BLM18KG331SH1D/5881246, Filter Type="Power Line", Height (Max)="0.037\" (0.95mm)", Impedance @ Frequency="330 Ohms @ 100 MHz", LastUpdated="3/11/2024 7:43:28 AM", Lifecycle Status=Active, Minimum Order=1, Mounting Type="Surface Mount", Number of Lines=1, Package / Case="0603 (1608 Metric)", Packaging=TapeAndReel, Part Number=BLM18KG331SH1D, Part Status=Active, partid=932, Price=0.02, Series="EMIFIL®, BLM18", Size / Dimension="0.063\" L x 0.032\" W (1.60mm x 0.80mm)", Supplier 1=DigiKey
FB2: library part BLM18PG121SN1D, "Ferrite Beads Multi-Layer 120Ohm 25% 100MHz 2A 50mOhm DCR 0603 Paper T/R", Case Code (Imperial)=0603, Case Code (Metric)=1608, Current Rating=2A, DC Resistance (DCR)=50mR, Frequency=100MHz, Manufacturer=Murata, Max Operating Temperature=125°C, Min Operating Temperature=-55°C, Package Quantity=1, Supplier Part Number 1=81-BLM18PG121SN1D, Tolerance=25%, Case/Package=0603, Category="Ferrite Beads and Chips", ComponentLink1Description=https://datasheet.ciiva.com/5709/1740433-5709171.pdf?src-supplier=Farnell, ComponentLink1URL=https://datasheet.ciiva.com/5709/1740433-5709171.pdf?src-supplier=Farnell, ComponentLink2Description=https://datasheet.ciiva.com/19454/1845013-19454715.pdf?src-supplier=Jameco, ComponentLink2URL=https://datasheet.ciiva.com/19454/1845013-19454715.pdf?src-supplier=Jameco, ComponentLink3Description=https://datasheet.ciiva.com/11799/0900766b81275ca5-11799546.pdf?src-supplier=Rs, ComponentLink3URL=https://datasheet.ciiva.com/11799/0900766b81275ca5-11799546.pdf?src-supplier=Rs, ComponentLink4Description=https://datasheet.ciiva.com/3854/5emiapbde-1-3854039.pdf?src-supplier=Arrow+Electronics, ComponentLink4URL=https://datasheet.ciiva.com/3854/5emiapbde-1-3854039.pdf?src-supplier=Arrow+Electronics, ComponentLink5Description=https://datasheet.ciiva.com/29347/442365-da-01-en-chip-drossel-0603-120r-2000ma-1-6x0-8mm-29347911.pdf?src-supplier=Conrad, ComponentLink5URL=https://datasheet.ciiva.com/29347/442365-da-01-en-chip-drossel-0603-120r-2000ma-1-6x0-8mm-29347911.pdf?src-supplier=Conrad, ComponentLink6Description=https://datasheet.ciiva.com/8021/1740433-8021493.pdf?src-supplier=Element14, ComponentLink6URL=https://datasheet.ciiva.com/8021/1740433-8021493.pdf?src-supplier=Element14, ComponentLink7Description=https://datasheet.ciiva.com/8021/1740433-8021494.pdf?src-supplier=Element14, ComponentLink7URL=https://datasheet.ciiva.com/8021/1740433-8021494.pdf?src-supplier=Element14, ComponentLink8Description=https://datasheet.ciiva.com/14122/blm-series-eng-tds-14122905.pdf?src-supplier=Distrelec, ComponentLink8URL=https://datasheet.ciiva.com/14122/blm-series-eng-tds-14122905.pdf?src-supplier=Distrelec, ComponentLink9Description=https://datasheet.ciiva.com/6212/l0110s0100blm18p-6212502.pdf?src-supplier=Digikey, ComponentLink9URL=https://datasheet.ciiva.com/6212/l0110s0100blm18p-6212502.pdf?src-supplier=Digikey, ComponentLink10Description=https://datasheet.ciiva.com/6212/l0110s0100blm18p-6212504.pdf?src-supplier=Digikey, ComponentLink10URL=https://datasheet.ciiva.com/6212/l0110s0100blm18p-6212504.pdf?src-supplier=Digikey, ComponentLink11Description=https://datasheet.ciiva.com/3081/l0110s0100blm18p-3081632.pdf?src-supplier=Avnet, ComponentLink11URL=https://datasheet.ciiva.com/3081/l0110s0100blm18p-3081632.pdf?src-supplier=Avnet, ComponentLink12Description=https://datasheet.ciiva.com/41449/001172297-da-01-en-drossel-0603-120r-1-6x0-8mm-4000st-41449659.pdf?src-supplier=Conrad, ComponentLink12URL=https://datasheet.ciiva.com/41449/001172297-da-01-en-drossel-0603-120r-1-6x0-8mm-4000st-41449659.pdf?src-supplier=Conrad, Core Material=Ferrite, DC Current=2A, DC Resistance-Max=50mR, Depth=0.8mm, Height=0.8mm, Impedance=120R, Lead Free="Lead Free", Length=1.6mm, Manufacturer Part Number=BLM18PG121SN1D, Material=Steel,Ferrite, Max Current Rating=2A, Max DC Current=2A, Number of Circuits=1NUMBER, Number of Lines=1, Number of Pins=2, Packaging="Tape and Reel", Pricing 1="1=0.1, 10=0.059, 50=0.047, 100=0.042, 1000=0.029, 10000=0.018 (USD)", Radiation Hardening=No, Reach SVHC Compliant=No, RMS Current (Irms)=2A, RoHS=Yes, RoHS Compliant=Yes, Series=BLM18P, Series Resistance=50mR, Shielding=202Shielding, Stock 1=377848, Supplier 1=Mouser, Termination=SMD/SMT, Test Frequency=100MHz, Width=0.8mm
J1: library part "MICRO USB B"
J2: Package=None, Availability=Unavailable, MF="{'manufacturer': u'JST Sales America Inc.'}", MP=B2B-XH-A, Price=None
JDC1: library part DCIN, "Jac DC input"
L1: library part "INDMOI0016 1W2T 2.2uH 20% 5A 0420 SMD", "IND MOI 1W2T 2.2uH 20% 5A 0420 SMD", CERTIFICATION=NA, CLASS=B, ComponentLink1Description=Datasheet, ComponentLink1URL=https://datasheet.lcsc.com/lcsc/2305161117_cjiang--Changjiang-Microelectronics-Tech-FXL0420-2R2-M_C167206.pdf, LINE=SMT, MOUNT=SMD, TMG CODE=None, TYPE=EP, UNIT=PCS
L2: library part "INDMOI0013 1W2T 1.5uH 20% 14A 0630 SMD", "IND MOI 1W2T 1.5uH 20% 14A 0630 SMD", CERTIFICATION=NA, CLASS=B, ComponentLink1Description=Datasheet, ComponentLink1URL=https://datasheet.lcsc.com/lcsc/2210101130_SHOU-HAN-CYA0630-1-5UH_C5189745.pdf, LINE=SMT, MOUNT=SMD, TMG CODE=None, TYPE=EP, UNIT=PCS
MH1 MH2 MH3 MH4: library part MH
Q1 Q2: library part MMBT3904, "MMBT3904 Series 40 V CE Breakdown 0.2 A NPN General Purpose Amplifier - SOT-23", Case/Package=SOT-23, Collector Base Voltage (VCBO)=60V, Collector Emitter Breakdown Voltage=40V, Collector Emitter Saturation Voltage=300mV, Current Rating=200mA, Emitter Base Voltage (VEBO)=6V, Manufacturer=onsemi, Max Operating Temperature=150°C, Max Power Dissipation=350mW, Min Operating Temperature=-55°C, Package Quantity=1, Supplier Part Number 1=9846727, Transition Frequency=300MHz, Category=BJTs, Collector Emitter Voltage (VCEO)=40V, Collector-emitter Voltage-Max=300mV, hFE Min=100, Lead Free="Lead Free", Manufacturer Part Number=MMBT3904, Max Breakdown Voltage=40V, Max Collector Current=200mA, MOUNT="Surface Mount", Number of Pins=3, Packaging="Tape and Reel", Polarity=NPN, Pricing 1="5=0,136, 25=0,133, 100=0,0476, 250=0,0435, 500=0,043, 1000=0,022, 5000=0,02 (GBP)", Radiation Hardening=No, Reach SVHC Compliant=No, RoHS=Yes, RoHS Compliant=Yes, Series=-, Supplier 1=Farnell, Termination=SMD/SMT, Voltage Rating (DC)=40V, Weight=0.03g
Q3: "Single N-Channel 40 V 0.004 Ohm 196 nC HEXFET® Power Mosfet - TO-220-3", Case/Package=TO-220AB, Continuous Drain Current (ID)=75A, Current Rating=162A, Drain to Source Breakdown Voltage=40V, Drain to Source Resistance=4mΩ, Gate to Source Voltage (Vgs)=20V, Input Capacitance=5.669nF, Manufacturer=Infineon, Max Junction Temperature (Tj)=175°C, Max Power Dissipation=200W, Min Operating Temperature=-55°C, Package Quantity=1000, Threshold Voltage=4V, Category=MOSFETs, China RoHS=Non-Compliant, ComponentLink1Description=https://datasheet.octopart.com:443/IRF1404PBF-Infineon-datasheet-180066866.pdf?src-supplier=IHS, ComponentLink1URL=https://datasheet.octopart.com:443/IRF1404PBF-Infineon-datasheet-180066866.pdf?src-supplier=IHS, ComponentLink2Description=https://datasheet.octopart.com:443/IRF1404PBF-Infineon-datasheet-62314054.pdf?src-supplier=IHS, ComponentLink2URL=https://datasheet.octopart.com:443/IRF1404PBF-Infineon-datasheet-62314054.pdf?src-supplier=IHS, ComponentLink3Description=https://datasheet.octopart.com:443/IRF1404PBF-Infineon-datasheet-8117651.pdf?src-supplier=IHS, ComponentLink3URL=https://datasheet.octopart.com:443/IRF1404PBF-Infineon-datasheet-8117651.pdf?src-supplier=IHS, ComponentLink4Description=https://datasheet.octopart.com:443/IRF1404PBF-Infineon-datasheet-10898762.pdf?src-supplier=Factory+Futures, ComponentLink4URL=https://datasheet.octopart.com:443/IRF1404PBF-Infineon-datasheet-10898762.pdf?src-supplier=Factory+Futures, ComponentLink5Description=https://datasheet.octopart.com:443/IRF1404PBF-Infineon-datasheet-8329159.pdf?src-supplier=Factory+Futures, ComponentLink5URL=https://datasheet.octopart.com:443/IRF1404PBF-Infineon-datasheet-8329159.pdf?src-supplier=Factory+Futures, ComponentLink6Description=https://datasheet.octopart.com:443/IRF1404PBF-International-Rectifier-datasheet-7273.pdf?src-supplier=Newark, ComponentLink6URL=https://datasheet.octopart.com:443/IRF1404PBF-International-Rectifier-datasheet-7273.pdf?src-supplier=Newark, ComponentLink7Description=https://datasheet.octopart.com:443/IRF1404PBF-International-Rectifier-datasheet-14061466.pdf?src-supplier=iiiC, ComponentLink7URL=https://datasheet.octopart.com:443/IRF1404PBF-International-Rectifier-datasheet-14061466.pdf?src-supplier=iiiC, ComponentLink8Description=https://datasheet.octopart.com:443/IRF1404-International-Rectifier-datasheet-10847710.pdf?src-supplier=iiiC, ComponentLink8URL=https://datasheet.octopart.com:443/IRF1404-International-Rectifier-datasheet-10847710.pdf?src-supplier=iiiC, ComponentLink9Description=https://datasheet.octopart.com:443/IRF1404PBF-Infineon-datasheet-10021476.pdf?src-supplier=RS+(Formerly+Allied+Electronics), ComponentLink9URL=https://datasheet.octopart.com:443/IRF1404PBF-Infineon-datasheet-10021476.pdf?src-supplier=RS+(Formerly+Allied+Electronics), ComponentLink10Description=https://datasheet.octopart.com:443/IRF1404PBF-International-Rectifier-datasheet-7628077.pdf?src-supplier=Jameco, ComponentLink10URL=https://datasheet.octopart.com:443/IRF1404PBF-International-Rectifier-datasheet-7628077.pdf?src-supplier=Jameco, ComponentLink11Description=https://datasheet.octopart.com:443/IRF1404PBF-International-Rectifier-datasheet-8134560.pdf?src-supplier=Farnell, ComponentLink11URL=https://datasheet.octopart.com:443/IRF1404PBF-International-Rectifier-datasheet-8134560.pdf?src-supplier=Farnell, ComponentLink12Description=https://datasheet.octopart.com:443/IRF1404PBF-International-Rectifier-datasheet-90335.pdf?src-supplier=DigiKey, ComponentLink12URL=https://datasheet.octopart.com:443/IRF1404PBF-International-Rectifier-datasheet-90335.pdf?src-supplier=DigiKey, ComponentLink13Description=http://sigma.octopart.com:80/conflict_mineral_statement/Infineon-company-51.pdf?src-supplier=Compliance+Statements, ComponentLink13URL=http://sigma.octopart.com:80/conflict_mineral_statement/Infineon-company-51.pdf?src-supplier=Compliance+Statements, ComponentLink14Description=http://sigma.octopart.com:80/rohs_statement/International-Rectifier-company-54.pdf?src-supplier=Compliance+Statements, ComponentLink14URL=http://sigma.octopart.com:80/rohs_statement/International-Rectifier-company-54.pdf?src-supplier=Compliance+Statements, ComponentLink15Description=http://sigma.octopart.com:80/reach_statement/International-Rectifier-company-55.pdf?src-supplier=Compliance+Statements, ComponentLink15URL=http://sigma.octopart.com:80/reach_statement/International-Rectifier-company-55.pdf?src-supplier=Compliance+Statements, Contact Plating=Tin, Drain to Source Voltage (Vdss)=40V, Dual Supply Voltage=40V, Element Configuration=Single, Fall Time=33ns, Height=19.8mm, Lead Free="Lead Free", Lead Pitch=2.54mm, Length=10.668mm, Lifecycle Status=Production, Manufacturer Part Number=IRF1404PBF, Max Operating Temperature=175°C, Min Breakdown Voltage=40V, MOUNT="Through Hole", Nominal Vgs=4V, Number of Channels=1, Number of Elements=1, Number of Pins=3, Number of Terminals=3, On-State Resistance=4mΩ, Packaging=Bulk, Power Dissipation=200W, Pricing 1="1=0,5792 (USD)", Radiation Hardening=No, Rds On Max=4mΩ, REACH SVHC=Yes, Recovery Time=117ns, Resistance=4mΩ, Rise Time=190ns, RoHS=Compliant, Schedule B="8541290080, 8541290080|8541290080, 8541290080|8541290080|8541290080, 8541290080|8541290080|8541290080|8541290080", Stock 1=284019, Supplier 1="Arrow Electronics", Supplier Part Number 1=IRF1404PBF, Termination="Through Hole", Turn-Off Delay Time=46ns, Turn-On Delay Time=17ns, Voltage Rating (DC)=40V, Width=4.826mm
Q4 Q5: "Transistor General Purpose BJT NPN 40 Volt 0.2A Automotive 3-Pin SOT-23", Case/Package=SOT-23, Collector Base Voltage (VCBO)=60V, Collector Emitter Breakdown Voltage=40V, Collector Emitter Saturation Voltage=300mV, Continuous Collector Current=200mA, Emitter Base Voltage (VEBO)=6V, Frequency=300MHz, Manufacturer="Diodes Zetex", Max Operating Temperature=150°C, Max Power Dissipation=300mW, Min Operating Temperature=-55°C, Package Quantity=3000, Power Dissipation=350mW, Category=BJTs, Collector Emitter Voltage (VCEO)=40V, Collector-emitter Voltage-Max=300mV, ComponentLink1Description=https://datasheet.ciiva.com/11201/ds30036-11201778.pdf?src-supplier=Avnet, ComponentLink1URL=https://datasheet.ciiva.com/11201/ds30036-11201778.pdf?src-supplier=Avnet, ComponentLink2Description=https://datasheet.ciiva.com/15138/getdatasheetpartid-53265-15138780.pdf?src-supplier=Verical, ComponentLink2URL=https://datasheet.ciiva.com/15138/getdatasheetpartid-53265-15138780.pdf?src-supplier=Verical, ComponentLink3Description=https://datasheet.ciiva.com/22711/1915516-22711750.pdf?src-supplier=Element14, ComponentLink3URL=https://datasheet.ciiva.com/22711/1915516-22711750.pdf?src-supplier=Element14, ComponentLink4Description=https://datasheet.ciiva.com/11198/ds30036-11198999.pdf?src-supplier=Avnet, ComponentLink4URL=https://datasheet.ciiva.com/11198/ds30036-11198999.pdf?src-supplier=Avnet, ComponentLink5Description=https://datasheet.ciiva.com/6361/ds30036-6361256.pdf?src-supplier=Digikey, ComponentLink5URL=https://datasheet.ciiva.com/6361/ds30036-6361256.pdf?src-supplier=Digikey, ComponentLink6Description=https://datasheet.ciiva.com/6361/ds30036-6361254.pdf?src-supplier=Digikey, ComponentLink6URL=https://datasheet.ciiva.com/6361/ds30036-6361254.pdf?src-supplier=Digikey, Gain Bandwidth Product=300MHz, Height=1mm, hFE Min=100, Lead Free="Lead Free", Length=3.05mm, Manufacturer Part Number=MMBT3904-7-F, Max Breakdown Voltage=40V, Max Collector Current=200mA, Max Frequency=300MHz, MOUNT="Surface Mount", Number of Elements=1, Number of Pins=3, Packaging="Tape and Reel", Polarity=NPN, Pricing 1="3000=0.0199, 6000=0.017, 9000=0.0168, 15000=0.0149, 21000=0.0147, 30000=0.0128, 75000=0.0127, 150000=0.0126, 300000=0.0105 (USD)", Radiation Hardening=No, Reach SVHC Compliant=No, RoHS=Yes, RoHS Compliant=Yes, Series="Automotive, AEC-Q101", Stock 1=969000, Supplier 1="Arrow Electronics", Supplier Part Number 1=MMBT3904-7-F, Transition Frequency=300MHz, Voltage Rating (DC)=40V, Weight=0.000282oz, Width=1.4mm